# Altium PCB 330 下灯位.PcbDoc (part 3 of 5)
Units mm, origin at the board's own origin, x right, y up, seen from the top; angles counter-clockwise.
Board outline 301.8 x 92.3 mm, 2 copper layers (Top, Bottom), stack 0.323 mm thick; 298 components, 203 nets, 2190 pads, 758 vias.
Unrouted connection lines stored in the file: 36.
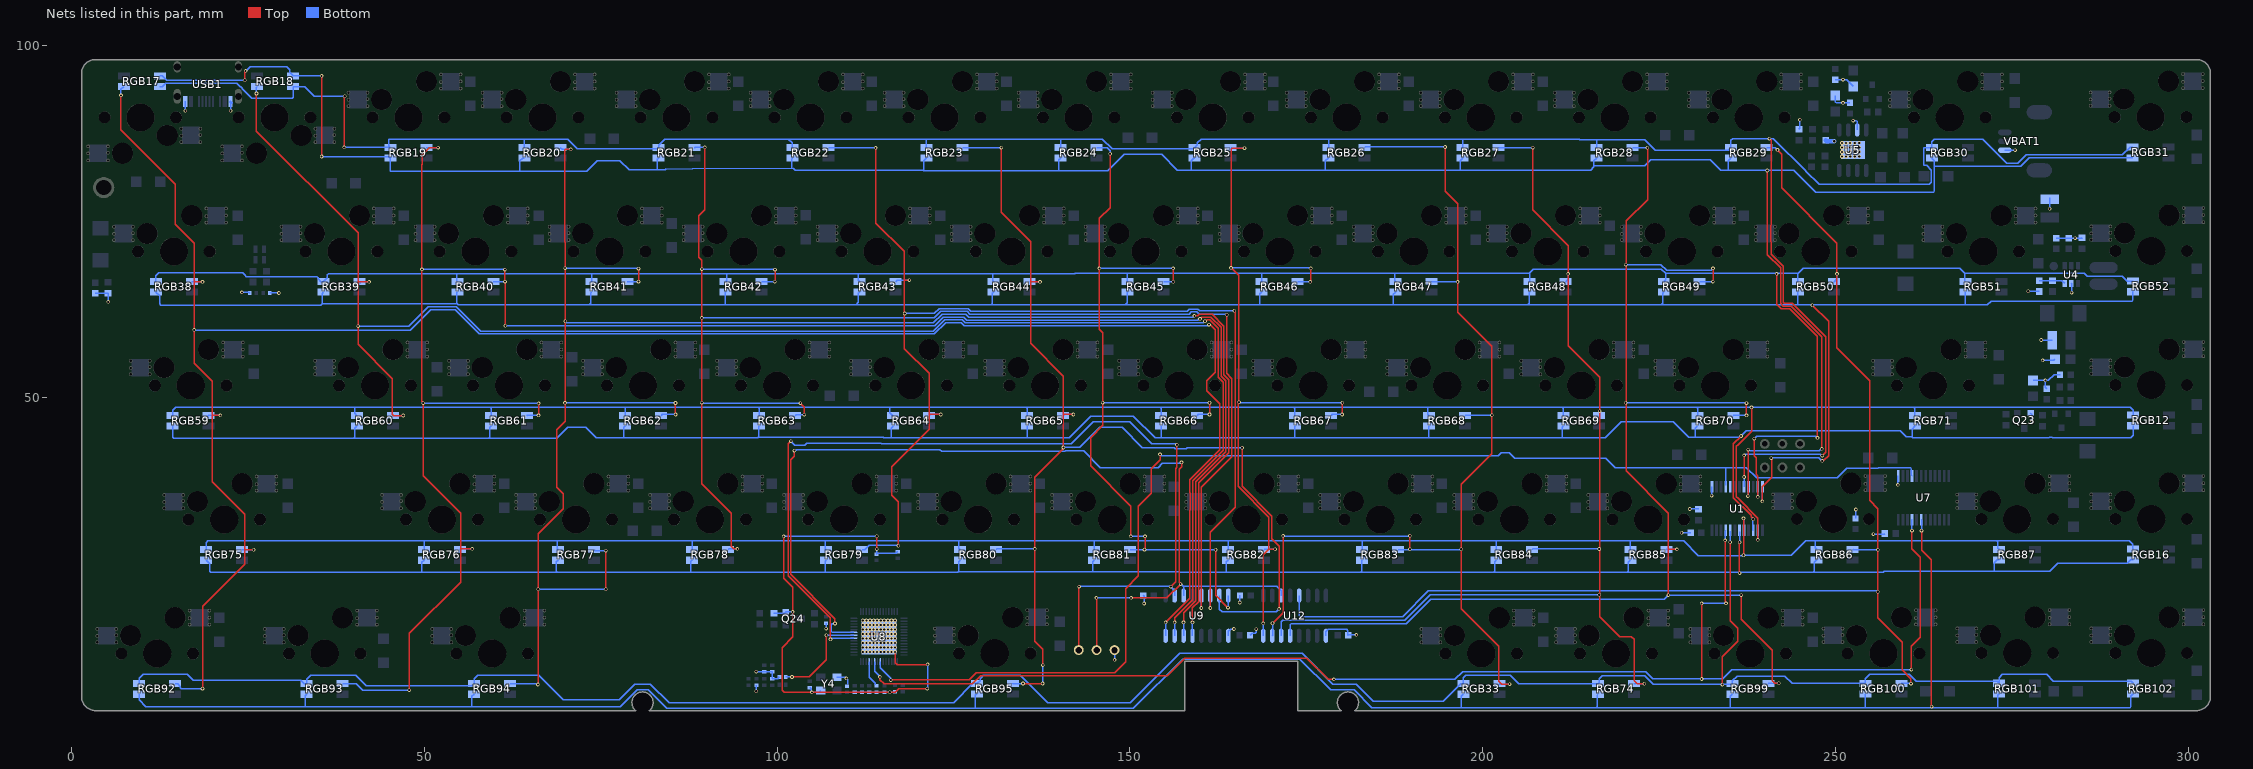
[diagram p3: the nets of this part, all layers, seen from the top]

## Via types
v1: diameter 0.508, hole 0.305, Top to Bottom, tented both sides, 758 vias

## Nets (pads, with @x,y where several pads share a name; then routed paths per layer and width w, separated by ;. In a path a pad name is that pad's centre, name@x,y a point inside that pad or via, vN(x,y) a via of type N, cw(c..) or ccw(c..) an arc to the next point about the centre after c; other vN are vias at no path point) (continued)
DG1: RGB17.1 RGB18.1 RGB19.1 RGB20.1 RGB21.1 RGB22.1 RGB23.1 RGB24.1 RGB25.1 RGB26.1 RGB27.1 RGB28.1 RGB29.1 RGB30.1 RGB31.1 U1.9 | length 387
  Top w0.2: v1(24.519,94.996) 24.519,96.115 24.652,96.248 v1(24.652,96.332) ; v1(35.427,84.195) v1(35.427,95.625) ; v1(237.611,36.048) 237.659,36.096 237.659,42.633 v1(237.664,42.637) ; v1(240.346,82.217) 240.346,70.296 242.235,68.407 242.235,63.36 242.603,62.992 243.737,62.992 248.087,58.642 v1(248.087,42.752)
  Bottom w0.152: 84.287,82.47 84.311,82.494 88.031,82.494 88.034,82.497 102.065,82.497 102.301,82.497
  Bottom w0.2: RGB17.1@12.503,95.614 12.853,95.614 13.471,94.996 v1(24.519,94.996) ; v1(24.652,96.332) 24.704,96.332 25.273,96.901 30.447,96.901 30.879,96.469 30.879,96.119 RGB18.1@31.379,95.619 35.421,95.619 v1(35.427,95.625) v1@35.433,95.631 ; v1(35.427,84.195) 44.908,84.195 45.16,83.942 45.16,82.152 45.212,82.1 63.501,82.1 ; RGB20.1@64.182,83.964 63.901,83.964 63.501,83.564 63.501,82.1 ; RGB21.1@83.182,83.964 83.036,83.819 83.036,82.31 83.056,82.29 ; 84.287,82.47 84.107,82.29 83.056,82.29 ; 102.065,82.497 102.065,83.847 RGB22.1@102.182,83.964 ; 102.301,82.497 102.585,82.213 120.684,82.213 120.749,82.148 ; RGB23.1@121.182,83.964 121.149,83.964 120.749,83.564 120.749,82.148 ; 139.953,82.22 139.953,83.735 RGB24.1@140.182,83.964 ; 158.688,82.267 158.688,83.564 159.088,83.964 RGB25.1@159.182,83.964 ; 177.691,82.273 196.86,82.273 ; RGB26.1@178.182,83.964 178.091,83.964 177.691,83.564 177.691,82.248 158.688,82.248 156.749,82.248 154.504,84.493 149.203,84.493 146.858,82.148 139.953,82.148 120.749,82.148 ; 196.843,82.273 196.843,83.626 RGB27.1@197.182,83.964 ; 196.86,82.271 215.323,82.271 215.768,82.715 215.768,82.856 ; RGB28.1@216.182,83.964 216.168,83.964 215.768,83.564 215.768,82.856 ; 234.835,82.256 233.739,82.256 232.258,83.736 223.804,83.736 222.967,82.899 220.514,82.899 220.472,82.856 215.768,82.856 ; 234.835,82.269 240.293,82.269 v1(240.346,82.217) ; 234.835,82.35 234.835,83.617 RGB29.1@235.182,83.964 ; v1(237.611,36.048) 237.668,36.106 237.668,37.34 U1.9@237.718,37.39 ; v1(237.664,42.637) 237.747,42.637 237.921,42.463 247.728,42.463 248.017,42.752 v1(248.087,42.752) ; v1@240.346,82.269 244.089,82.269 247.223,79.135 263.934,79.135 264.051,79.252 264.051,82.804 ; RGB30.1@263.682,83.964 264.051,83.595 264.051,82.804 ; RGB31.1@292.142,84.014 277.476,84.014 276.266,82.804 264.051,82.804 ; 63.501,82.1 73.008,82.1 74.509,83.601 77.691,83.601 79.002,82.29 83.056,82.29
DG2: RGB38.1 RGB39.1 RGB40.1 RGB41.1 RGB42.1 RGB43.1 RGB44.1 RGB45.1 RGB46.1 RGB47.1 RGB48.1 RGB49.1 RGB50.1 RGB51.1 RGB52.1 U1.12 | length 347.6
  Top w0.2: v1(239.667,35.308) 239.667,37.367 241.001,38.701 241.001,41.353 v1(240.919,41.435) ; v1(246.761,63.119) 249.041,60.839 249.041,41.804 248.397,41.16 248.348,41.16 248.242,41.054 v1(248.159,41.054)
  Bottom w0.2: RGB38.1@11.932,64.964 12.446,64.45 12.446,63.298 12.6,63.144 35.324,63.144 35.477,63.298 35.477,64.76 RGB39.1@35.682,64.964 ; 35.477,63.301 54.67,63.301 54.809,63.162 73.371,63.162 ; 54.61,63.301 54.61,64.892 RGB40.1@54.682,64.964 ; RGB41.1@73.682,64.964 73.597,64.879 73.597,63.387 73.371,63.162 ; RGB42.1@92.682,64.964 92.623,64.905 92.623,63.285 92.5,63.162 ; RGB43.1@111.682,64.964 111.527,64.809 111.527,63.501 111.188,63.162 ; RGB44.1@130.682,64.964 130.521,64.803 130.521,63.301 130.382,63.162 ; RGB45.1@149.682,64.964 149.625,64.907 149.625,63.92 149.625,63.43 149.357,63.162 ; RGB46.1@168.682,64.964 168.441,64.723 168.441,63.279 168.324,63.162 ; RGB47.1@187.682,64.964 187.359,64.641 187.359,63.28 187.241,63.162 ; RGB48.1@206.682,64.964 206.617,64.899 206.617,63.408 206.371,63.162 ; RGB49.1@225.682,64.964 225.553,64.835 225.553,63.368 225.347,63.162 ; v1(239.667,35.308) U1.12@239.667,37.389 ; v1(240.919,41.435) 241.002,41.435 241.08,41.513 247.645,41.513 248.103,41.054 v1(248.159,41.054) ; RGB50.1@244.682,64.964 244.682,63.162 ; RGB51.1@268.432,64.964 268.432,63.279 268.315,63.162 ; RGB52.1@292.236,65.025 292.202,64.99 292.202,63.815 292.085,63.698 272.105,63.698 271.569,63.162 268.315,63.162 ; 73.371,63.162 92.5,63.162 ; 92.5,63.162 111.188,63.162 ; 111.188,63.162 130.382,63.162 ; 130.382,63.162 149.357,63.162 ; 149.357,63.162 168.324,63.162 ; 168.324,63.162 187.241,63.162 ; 187.241,63.162 206.371,63.162 ; 206.371,63.162 225.347,63.162 ; 225.347,63.162 244.682,63.162 ; 244.682,63.162 268.315,63.162
DG3: RGB12.1 RGB59.1 RGB60.1 RGB61.1 RGB62.1 RGB63.1 RGB64.1 RGB65.1 RGB66.1 RGB67.1 RGB68.1 RGB69.1 RGB70.1 RGB71.1 U1.15 | length 323.4
  Top w0.2: v1(236.64,44.571) 235.56,43.491 235.56,35.833 238.066,33.327 238.066,33.163 238.379,32.849 v1(238.379,32.766)
  Bottom w0.2: RGB59.1@14.312,45.964 14.312,44.385 14.429,44.268 39.999,44.268 ; RGB60.1@40.437,45.964 40.116,45.644 40.116,44.385 39.999,44.268 ; RGB61.1@59.437,45.964 59.257,45.785 59.257,44.385 59.14,44.268 ; RGB62.1@78.437,45.964 78.273,45.801 78.273,44.323 ; 97.343,44.405 115.016,44.405 115.117,44.304 116.021,44.304 ; RGB63.1@97.437,45.964 97.379,45.906 97.379,44.44 97.243,44.304 78.292,44.304 78.273,44.323 ; RGB64.1@116.437,45.964 116.138,45.665 116.138,44.422 116.021,44.304 ; RGB65.1@135.437,45.964 135.437,44.422 135.319,44.304 ; RGB66.1@154.437,45.964 154.437,44.292 ; RGB67.1@173.437,45.964 173.383,45.91 173.383,44.336 ; 192.283,44.325 192.337,44.379 192.337,45.864 RGB68.1@192.437,45.964 ; 211.235,44.325 211.316,44.406 211.316,45.843 RGB69.1@211.437,45.964 ; RGB70.1@230.437,45.964 230.123,45.651 230.123,44.412 ; v1@236.625,44.566 237.398,45.339 259.177,45.339 260.076,44.44 260.888,44.44 ; v1(236.64,44.571) 236.63,44.561 236.537,44.561 236.388,44.412 230.123,44.412 ; U1.15@238.366,31.18 238.32,31.226 238.32,32.707 v1(238.379,32.766) ; RGB71.1@261.312,45.964 261.288,45.964 260.888,45.564 260.888,44.36 280.306,44.36 280.309,44.363 280.768,44.363 280.772,44.36 291.886,44.36 292.236,44.71 RGB12.1@292.236,46.025 ; 39.999,44.268 59.14,44.268 ; 59.14,44.268 68.779,44.268 70.312,45.801 72.704,45.801 72.707,45.798 72.86,45.798 74.335,44.323 78.273,44.323 ; 116.021,44.304 135.319,44.304 ; 135.319,44.304 141.373,44.304 144.454,47.386 150.5,47.386 153.593,44.292 154.437,44.292 ; 154.437,44.292 166.951,44.292 166.984,44.325 173.372,44.325 173.383,44.336 ; 173.383,44.336 173.393,44.325 192.337,44.325 211.316,44.325 217.376,44.325 219.652,46.601 227.051,46.601 229.241,44.412 230.123,44.412
DG4: RGB16.1 RGB75.1 RGB76.1 RGB77.1 RGB78.1 RGB79.1 RGB80.1 RGB81.1 RGB82.1 RGB83.1 RGB84.1 RGB85.1 RGB86.1 RGB87.1 U1.18 | length 303.2
  Top w0.2: v1(236.438,25.146) 236.407,25.177 236.407,29.482 v1@236.438,29.513 ; v1(236.443,29.513) v1@236.472,29.543
  Bottom w0.2: RGB75.1@19.062,26.964 19.558,26.468 19.558,25.411 19.675,25.293 49.534,25.293 ; RGB76.1@49.937,26.964 49.651,26.679 49.651,25.411 49.534,25.293 ; RGB77.1@68.937,26.964 68.703,26.73 68.703,25.411 68.82,25.293 ; RGB78.1@87.937,26.964 87.76,26.788 87.76,25.637 87.76,25.293 ; RGB79.1@106.937,26.964 106.82,26.847 106.82,25.293 ; RGB80.1@125.937,26.964 125.75,26.777 125.75,25.411 125.639,25.299 ; RGB81.1@144.937,26.964 144.74,26.768 144.74,25.299 ; RGB82.1@163.937,26.964 163.687,26.714 163.687,25.393 163.57,25.277 ; RGB83.1@182.937,26.964 182.88,26.907 182.88,25.416 182.741,25.277 ; RGB84.1@201.937,26.964 201.713,26.741 201.713,25.386 201.596,25.269 ; RGB85.1@220.937,26.964 220.65,26.677 220.65,25.386 220.533,25.269 ; v1(236.443,29.513) U1.18@236.443,31.018 ; RGB86.1@247.352,27.014 246.987,26.649 246.987,25.385 246.869,25.268 ; RGB87.1@273.225,27.009 272.969,27.009 272.569,26.609 272.569,25.41 ; RGB16.1@292.236,27.025 291.886,27.025 291.397,26.536 281.507,26.536 280.381,25.41 272.569,25.41 ; 49.534,25.293 68.82,25.293 ; 68.82,25.293 87.76,25.293 ; 87.76,25.293 106.82,25.293 ; 106.82,25.293 106.822,25.291 125.63,25.291 125.639,25.299 ; 125.639,25.299 144.74,25.299 ; 144.74,25.299 150.443,25.299 150.486,25.343 156.995,25.343 157.061,25.276 163.57,25.276 ; 163.57,25.277 182.741,25.277 ; 182.741,25.277 182.733,25.269 201.596,25.269 ; 201.596,25.269 220.533,25.269 ; 220.533,25.269 230.99,25.269 230.991,25.268 236.438,25.268 246.869,25.268 ; 246.869,25.268 256.763,25.268 256.905,25.41 272.569,25.41
DG5: RGB33.1 RGB74.1 RGB92.1 RGB93.1 RGB94.1 RGB95.1 RGB99.1 RGB100.1 RGB101.1 RGB102.1 U7.19 | length 336.5
  Top w0.2: v1(262.224,31.164) 262.224,28.398 263.58,27.042 263.58,6.284 v1(263.656,6.208)
  Bottom w0.2: RGB92.1@9.562,7.964 9.562,7.158 10.519,6.201 33.115,6.201 ; RGB93.1@33.307,7.964 33.115,7.773 33.115,6.201 ; RGB94.1@57.052,7.964 56.735,7.647 56.735,6.318 56.618,6.201 ; RGB95.1@128.307,8.006 128.09,7.789 128.09,5.996 128.063,5.969 ; RGB33.1@197.27,7.964 196.989,7.683 196.989,6.187 196.871,6.07 ; RGB74.1@216.357,7.964 216.25,7.857 216.25,6.187 216.133,6.07 ; 235.143,6.069 254.273,6.069 ; RGB99.1@235.407,7.964 235.142,7.699 235.142,6.07 216.133,6.07 ; RGB100.1@254.273,7.998 254.273,6.069 ; U7.19@262.184,32.714 262.227,32.671 262.224,32.669 v1(262.224,31.164) ; 273.049,6.069 263.656,6.069 254.273,6.069 ; RGB101.1@273.225,8.025 273.05,7.85 273.05,6.07 291.796,6.07 291.913,6.187 291.913,7.702 RGB102.1@292.236,8.025 ; 33.115,6.201 56.618,6.201 ; 56.618,6.201 77.743,6.201 80.143,8.601 81.707,8.601 84.339,5.969 128.063,5.969 ; 128.063,5.969 150.481,5.969 157.468,12.956 174.09,12.956 178.445,8.601 181.777,8.601 184.308,6.07 196.871,6.07 ; 196.871,6.07 216.133,6.07
DIN: DIN.1 U8.35 U9.2 | length 135.9
  Top w0.2: v1(101.942,43.851) 101.537,43.446 101.537,24.782 107.541,18.778 107.541,15.773 v1(107.562,15.752) ; DIN.1@142.748,14.224 142.775,14.251 142.775,23.205 v1(142.801,23.231) ; v1(155.785,23.226) 156.493,23.935 156.493,39.965 156.673,40.145 v1(156.673,43.338)
  Bottom w0.2: v1(101.942,43.851) 102.496,43.297 103.932,43.297 104.168,43.533 114.756,43.533 114.785,43.504 141.704,43.504 144.786,46.586 149.989,46.586 153.098,43.478 156.425,43.478 156.564,43.338 v1(156.673,43.338) ; v1(107.562,15.752) 107.74,15.929 U8.35@110.877,15.929 ; v1(142.801,23.231) 142.826,23.256 155.755,23.256 v1(155.785,23.226) 155.785,23.209 156.337,22.656 U9.2@156.337,21.956
DR0: U1.5
DR1: RGB17.2 RGB18.2 RGB19.2 RGB20.2 RGB21.2 RGB22.2 RGB23.2 RGB24.2 RGB25.2 RGB26.2 RGB27.2 RGB28.2 RGB29.2 RGB30.2 RGB31.2 U1.8 | length 382.4
  Top w0.2: v1(38.63,85.484) 38.63,92.669 v1(38.707,92.746) ; v1(237.064,38.758) 237.066,38.76 237.066,41.827 v1(237.064,41.829) ; v1(240.665,86.741) 240.665,86.704 240.9,86.47 240.9,74.48 240.882,74.462 240.882,72.107 240.9,72.089 240.9,70.36 241.777,69.482 241.795,69.482 242.652,68.625 242.652,63.509 242.769,63.392 243.903,63.392 248.641,58.654 248.641,42.266 248.172,41.797 v1(248.144,41.797)
  Bottom w0.2: RGB17.2@12.503,94.114 12.853,94.114 13.335,94.596 23.387,94.596 23.908,94.075 23.942,94.075 24.411,93.606 24.411,93.572 25.527,92.456 31.262,92.456 31.379,92.573 RGB18.2@31.379,94.119 33.008,94.119 34.381,92.746 v1(38.707,92.746) ; v1(38.63,85.484) RGB19.2@45.163,85.484 ; RGB19.2@45.182,85.464 44.925,85.722 44.925,86.673 70.299,86.673 71.687,85.285 82.971,85.285 RGB21.2@83.15,85.464 ; RGB20.2@64.182,85.464 64.182,86.535 ; RGB21.2@83.182,85.464 83.182,85.815 84.04,86.673 101.59,86.673 ; RGB22.2@102.182,85.464 102.116,85.53 102.116,86.147 101.59,86.673 ; 121.155,86.58 121.155,85.491 RGB23.2@121.182,85.464 ; RGB24.2@140.182,85.464 140.182,86.647 140.208,86.673 ; RGB26.2@178.182,85.464 178.182,86.547 178.056,86.673 ; RGB27.2@197.182,85.464 197.182,86.673 ; 216.154,86.56 216.154,85.492 RGB28.2@216.182,85.464 ; v1(237.064,38.758) 237.066,38.756 237.066,37.392 U1.8@237.068,37.39 ; v1(237.064,41.829) 237.148,41.829 237.295,41.976 237.323,41.976 237.336,41.989 247.868,41.989 248.061,41.797 v1(248.144,41.797) ; RGB31.2@292.142,85.514 291.792,85.514 290.692,84.414 277.073,84.414 275.891,83.232 274.286,83.232 270.904,86.614 264.033,86.614 263.682,86.263 RGB30.2@263.682,85.464 262.626,85.464 262.509,85.347 262.509,83.048 262.626,82.931 262.968,82.931 263.629,82.27 263.629,80.521 263.338,80.23 247.737,80.23 245.828,82.139 245.828,82.144 241.231,86.741 v1(240.665,86.741) 235.458,86.741 235.182,86.465 RGB29.2@235.182,85.464 234.797,85.079 224.506,85.079 222.985,86.6 216.154,86.6 213.792,86.6 213.719,86.673 197.182,86.673 ; 101.59,86.673 121.155,86.673 140.208,86.673 ; 140.208,86.673 146.117,86.673 147.497,85.293 159.011,85.293 RGB25.2@159.182,85.464 159.184,85.464 159.584,85.864 159.584,86.147 160.11,86.673 178.056,86.673 ; 178.056,86.673 197.182,86.673
DR2: RGB38.2 RGB39.2 RGB40.2 RGB41.2 RGB42.2 RGB43.2 RGB44.2 RGB45.2 RGB46.2 RGB47.2 RGB48.2 RGB49.2 RGB50.2 RGB51.2 RGB52.2 U1.11 | length 344.2
  Top w0.2: v1(238.507,44.197) 238.507,41.759 238.767,41.5 238.767,39.145 239.014,38.898 v1(239.014,35.941) ; v1(241.681,67.564) 241.681,63.246 242.335,62.592 243.571,62.592 247.477,58.686 v1(247.477,44.309)
  Bottom w0.2: RGB38.2@11.932,66.464 11.932,67.304 12.319,67.691 24.257,67.691 24.491,67.457 24.774,67.174 25.174,67.174 34.736,67.174 34.932,66.978 34.932,66.864 35.332,66.464 RGB39.2@35.682,66.464 36.222,67.005 36.222,67.422 36.406,67.605 54.465,67.605 ; RGB40.2@54.682,66.464 54.582,66.564 54.582,67.488 54.465,67.605 ; RGB41.2@73.682,66.464 73.682,67.574 73.651,67.605 ; RGB42.2@92.682,66.464 92.837,66.619 92.837,67.605 ; RGB43.2@111.682,66.464 111.506,66.64 111.506,67.605 ; RGB44.2@130.682,66.464 130.556,66.59 130.556,67.605 ; RGB45.2@149.682,66.464 149.606,66.54 149.606,67.645 ; RGB46.2@168.682,66.464 168.682,67.619 168.656,67.645 ; RGB47.2@187.682,66.464 187.567,66.58 187.567,67.645 ; RGB48.2@206.682,66.464 206.682,67.592 206.629,67.645 ; RGB49.2@225.682,66.464 225.933,66.715 225.933,67.645 ; v1(238.507,44.197) 238.848,44.538 247.206,44.538 247.436,44.309 v1(247.477,44.309) ; v1(239.014,35.941) 239.018,35.945 U1.11@239.018,37.39 ; RGB50.2@244.682,66.464 244.682,67.598 244.729,67.645 ; RGB51.2@268.432,66.464 268.338,66.558 268.338,67.645 ; RGB52.2@292.236,66.525 291.386,66.525 290.708,67.203 285.73,67.203 285.288,67.645 268.338,67.645 ; 54.465,67.605 73.651,67.605 ; 73.651,67.605 92.837,67.605 ; 92.837,67.605 111.506,67.605 ; 111.506,67.605 130.556,67.605 ; 130.556,67.605 142.213,67.605 142.252,67.645 149.606,67.645 ; 149.606,67.645 168.656,67.645 ; 168.656,67.645 187.567,67.645 ; 187.567,67.645 206.629,67.645 ; 206.629,67.645 207.202,68.218 225.36,68.218 225.933,67.645 ; 225.933,67.645 244.729,67.645 ; 244.729,67.645 245.429,68.345 267.638,68.345 268.338,67.645
DR3: RGB12.2 RGB59.2 RGB60.2 RGB61.2 RGB62.2 RGB63.2 RGB64.2 RGB65.2 RGB66.2 RGB67.2 RGB68.2 RGB69.2 RGB70.2 RGB71.2 U1.14 | length 317.3
  Top w0.2: v1(238.125,48.622) 238.125,45.273 236.211,43.358 235.96,43.107 235.96,35.998 236.211,35.747 239.018,32.94 v1(239.018,29.849)
  Bottom w0.2: RGB59.2@14.312,47.464 14.312,48.221 14.747,48.656 40.113,48.656 ; RGB60.2@40.437,47.464 40.113,47.789 40.113,48.656 ; 59.334,48.642 78.423,48.642 78.437,48.656 ; RGB61.2@59.437,47.464 59.437,48.539 59.32,48.656 40.113,48.656 ; RGB62.2@78.437,47.464 78.437,48.656 ; RGB63.2@97.437,47.464 97.437,48.539 97.32,48.656 ; RGB64.2@116.437,47.464 116.367,47.464 115.967,47.864 115.967,48.656 ; RGB65.2@135.437,47.464 135.437,48.539 135.32,48.656 ; RGB66.2@154.437,47.464 154.437,48.539 154.32,48.656 ; RGB67.2@173.437,47.464 173.355,47.546 173.355,48.514 173.213,48.656 ; RGB68.2@192.437,47.464 192.251,47.65 192.251,48.539 192.141,48.649 ; RGB69.2@211.437,47.464 211.437,48.539 211.327,48.649 ; RGB70.2@230.437,47.464 230.505,47.532 230.505,48.539 230.388,48.656 ; v1(238.125,48.622) 238.091,48.656 230.388,48.656 ; v1@238.125,48.656 261.099,48.656 ; v1(239.018,29.849) U1.14@239.018,31.19 ; RGB71.2@261.312,47.464 261.276,47.5 261.276,48.479 261.099,48.656 ; RGB12.2@292.236,47.525 292.236,48.251 291.846,48.641 267.142,48.641 267.127,48.656 261.099,48.656 ; 78.437,48.656 97.32,48.656 ; 97.32,48.656 115.967,48.656 ; 115.967,48.656 135.32,48.656 ; 135.32,48.656 154.32,48.656 ; 154.32,48.656 173.213,48.656 ; 173.213,48.656 181.259,48.656 181.266,48.649 192.141,48.649 ; 192.141,48.649 211.327,48.649 ; 211.327,48.649 220.854,48.649 220.861,48.656 230.388,48.656
DR4: RGB16.2 RGB75.2 RGB76.2 RGB77.2 RGB78.2 RGB79.2 RGB80.2 RGB81.2 RGB82.2 RGB83.2 RGB84.2 RGB85.2 RGB86.2 RGB87.2 U1.17 | length 298.9
  Top w0.2: v1(236.986,27.661) 236.997,27.672 236.997,32.878 v1(236.982,32.893) v1@237.038,32.949
  Bottom w0.2: RGB75.2@19.062,28.464 19.062,29.474 19.292,29.704 49.937,29.704 ; RGB76.2@49.937,28.464 49.937,29.704 ; RGB77.2@68.937,28.464 68.834,28.567 68.834,29.704 ; RGB78.2@87.937,28.464 87.937,29.651 87.884,29.704 ; RGB79.2@106.937,28.464 106.807,28.594 106.807,29.704 ; RGB80.2@125.937,28.464 125.73,28.671 125.73,29.704 ; RGB81.2@144.937,28.464 144.937,29.674 144.907,29.704 ; RGB82.2@163.937,28.464 163.937,29.653 163.886,29.704 ; RGB83.2@182.937,28.464 182.937,29.633 182.866,29.704 ; RGB84.2@201.937,28.464 201.93,28.471 201.93,29.704 ; RGB85.2@220.937,28.464 220.937,29.661 220.98,29.704 ; v1(236.982,32.893) 237.057,32.818 237.03,32.79 U1.17@237.03,31.486 ; RGB86.2@247.352,28.514 247.142,28.724 247.142,29.704 ; RGB87.2@273.225,28.509 273.038,28.695 273.038,29.579 272.914,29.704 ; RGB16.2@292.236,28.525 292.164,28.597 292.164,29.208 291.668,29.704 272.914,29.704 ; 49.937,29.704 68.834,29.704 ; 68.834,29.704 87.884,29.704 ; 87.884,29.704 106.807,29.704 ; 106.807,29.704 125.73,29.704 ; 125.73,29.704 144.907,29.704 ; 144.907,29.704 163.886,29.704 ; 163.886,29.704 182.866,29.704 ; 182.866,29.704 182.937,29.704 201.93,29.704 ; 201.93,29.704 220.98,29.704 ; 220.98,29.704 228.503,29.704 230.584,27.623 236.986,27.623 237.023,27.661 243.76,27.661 245.803,29.704 247.142,29.704 ; 247.142,29.704 272.914,29.704
DR5: RGB33.2 RGB74.2 RGB92.2 RGB93.2 RGB94.2 RGB95.2 RGB99.2 RGB100.2 RGB101.2 RGB102.2 U1.20 | length 330.2
  Top w0.2: v1(233.991,9.339) 233.991,13.265 236.198,15.472 236.198,17.294 235.109,18.383 235.109,29.497 v1(235.09,29.516)
  Bottom w0.2: RGB92.2@9.562,9.464 9.562,10.231 10.126,10.795 16.394,10.795 17.261,9.929 32.493,9.929 32.957,9.464 RGB93.2@33.307,9.464 33.307,10.066 33.909,10.668 40.259,10.668 41.783,9.144 56.732,9.144 RGB94.2@57.052,9.464 57.052,10.189 57.531,10.668 66.189,10.668 69.653,7.204 77.615,7.204 79.812,9.401 82.039,9.401 84.67,6.769 125.006,6.769 127.743,9.506 128.366,9.506 128.766,9.906 128.766,10.189 128.908,10.331 129.228,10.651 134.465,10.651 138.329,6.787 150.067,6.787 157.036,13.756 174.427,13.756 178.782,9.401 182.108,9.401 184.524,6.985 194.44,6.985 196.92,9.464 RGB33.2@197.27,9.464 197.27,10.326 197.611,10.667 203.893,10.667 205.096,9.464 RGB74.2@216.357,9.464 216.522,9.629 216.522,10.147 216.944,10.569 223.01,10.569 224.181,9.398 233.991,9.398 235.341,9.398 RGB99.2@235.407,9.464 235.407,9.855 236.093,10.541 242.824,10.541 243.867,9.498 RGB100.2@254.273,9.498 254.273,10.179 254.889,10.795 260.477,10.795 261.493,9.779 272.971,9.779 RGB101.2@273.225,9.525 273.225,10.335 273.685,10.795 279.968,10.795 280.929,9.834 291.927,9.834 RGB102.2@292.236,9.525 ; v1(235.09,29.516) U1.20@235.09,31.05
DVDD12-BT: C36.2 U8.36 | length 14.1
  Top w0.2: v1(102.108,10.414) 104.521,10.414 106.946,12.839 106.946,16.197 106.987,16.238 v1(106.987,16.327)
  Bottom w0.2: C36.2@101.23,10.414 v1(102.108,10.414) ; v1(106.987,16.327) 106.988,16.329 U8.36@110.877,16.329
DVDD12_SEC: C33.2 U8.25 | length 3.7
  Bottom w0.2: U8.25@113.027,12.579 113.027,10.385 113.881,9.531 C33.2@113.881,9.305 ; C33.2@113.881,9.305 C33.2@113.933,9.305
EC: 
FB: R40.2 R77.1 U4.3 | length 3.8
  Bottom w0.2: R77.1@278.916,66.603 282.118,66.603 U4.3@282.514,66.207
GCLK: U1.21 U7.21 U8.23 | length 200.4
  Top w0.2: v1(114.565,10.425) 114.565,10.004 115.147,9.422 127.659,9.422 128.853,10.616 155.324,10.616 157.48,12.772 157.789,13.081 175.103,13.081 178.111,10.072 v1(178.928,10.072) ; v1(231.046,10.125) v1(231.046,20.836) ; v1(234.379,29.768) 234.4,29.747 234.4,21.063 234.508,20.955 v1(234.508,20.836) ; v1(260.79,11.468) 260.753,11.505 260.753,14.754 262.012,16.013 262.012,27.421 260.858,28.575 260.858,31.153 v1(260.871,31.167)
  Bottom w0.2: U8.23@113.827,12.579 113.827,11.231 114.565,10.493 v1(114.565,10.425) ; v1(178.928,10.072) 196.06,10.072 197.164,11.176 223.139,11.176 224.155,10.16 234.031,10.16 235.305,11.434 260.756,11.434 v1(260.79,11.468) ; v1(231.046,20.836) v1(234.508,20.836) ; v1(234.379,29.768) 234.379,31.101 U1.21@234.468,31.19 ; v1(260.871,31.167) 260.871,32.701 U7.21@260.884,32.714
GND: C1.1 C2.1 C3.2 C4.1 C5.1 C6.2 C7.1 C11.1 C13.1 C14.2 C15.2 C16.1 C17.2 C19.1 C20.1 C21.1 C23.1 C25.1 C27.1 C28.1 C32.2 C33.1 C34.1 C35.1 C36.1 C37.1 C38.1 C40.1 C41.2 C43.1 C44.2 CA2.2 CA3.2 GND.1 Q23.2 Q24.2 R3.1 R5.1 R10.2 R11.2 R56.1 R70.2 R77.2 R80.2 R91.2 U1.1 U4.2 U5.3 U5.9 U7.1 U8.57 U9.9 U12.9 USB1.A1 USB1.B1 VBAT1.3 Y4.2 Y4.4 Z1.1 Z2.1 Z3.1 | length 150.5
  Top w0.2: v1(100.908,30.335) 100.908,24.441 102.235,23.114 102.235,16.082 100.711,14.558 100.711,8.509 100.999,8.221 v1(104.931,8.221) 104.949,8.238 115.934,8.238 v1(115.951,8.255) 116.713,8.255 117.221,8.763 v1(121.285,8.763) ; v1(114.117,28.544) v1(114.117,30.372) ; v1(116.713,13.97) 116.713,12.446 117.017,12.142 121.278,12.142 v1(121.332,12.196)
  Bottom w0.2: C21.1@3.321,64.805 R5.1@5.169,64.806 R5.1@5.169,64.806 v1(5.169,63.589) ; v1(16.121,90.676) USB1.A1@16.121,92.007 ; v1(22.521,90.676) 22.521,91.934 USB1.B1@22.521,92.007 ; v1(24.118,64.933) 25.094,64.933 25.213,64.815 Z2.1@25.25,64.852 ; Z1.1@28.038,64.852 v1(29.369,64.852) ; v1(97.028,8.382) 97.028,9.222 C27.1@97.061,9.255 ; v1(97.028,11.176) 97.043,11.161 Z3.1@98.171,11.161 C13.1@99.304,11.161 C13.1@99.304,11.161 C20.1@99.303,10.173 100.089,10.173 C36.1@100.33,10.414 ; R56.1@99.531,19.439 101.062,19.439 Q24.2@101.244,19.622 101.265,19.642 v1(102.185,19.642) ; v1(100.908,30.335) 114.08,30.335 v1(114.117,30.372) ; C7.1@104.614,8.879 104.664,8.879 104.814,8.729 104.814,8.338 v1(104.931,8.221) 105.914,8.221 Y4.2@106.175,8.482 ; v1(106.934,17.272) C38.1@106.934,18.034 ; Y4.4@108.475,10.382 109.633,10.382 v1(109.808,10.207) 109.982,10.033 109.982,9.398 ; C34.1@110.99,8.255 C43.1@112.019,8.255 116.655,8.255 R3.1@116.713,8.313 ; C37.1@114.081,27.839 114.203,27.961 116.869,27.961 117.044,28.136 C19.1@117.094,28.136 ; v1(114.117,28.544) 114.117,27.971 C37.1@114.127,27.961 ; v1(121.285,8.763) 121.332,8.81 v1(121.332,12.196) ; v1(147.828,12.827) GND.1@147.828,14.224 ; C14.2@151.904,21.971 152.019,21.856 v1(152.019,20.828) ; U9.9@163.957,16.256 163.957,16.878 164.292,17.213 v1(164.738,17.213) ; v1(165.578,20.968) C16.1@165.578,21.996 ; C17.2@167.03,16.32 167.347,16.637 167.791,16.637 167.908,16.754 v1(167.908,17.205) ; U12.9@177.8,16.256 177.8,16.821 178.124,17.145 180.71,17.145 180.902,16.953 180.902,16.381 C11.1@180.963,16.32 181.026,16.383 v1(182.118,16.383) ; v1(228.219,30.861) C35.1@229.489,30.861 ; v1(229.358,34.231) R10.2@230.628,34.231 ; v1(232.458,36.116) U1.1@232.458,37.386 ; R11.2@244.827,88.047 244.983,88.202 v1(244.983,89.408) ; C44.2@249.986,95.09 251.605,95.09 C3.2@252.549,94.146 ; C41.2@249.989,92.829 249.989,91.911 250.106,91.794 v1(251.094,91.794) C6.2@252.081,91.794 ; v1(252.532,89.279) 252.973,89.279 253.09,89.162 253.09,87.981 U5.3@253.111,87.96 ; C5.1@252.917,32.885 v1(252.917,34.155) ; v1(255.393,30.667) 255.395,30.665 256.971,30.665 R70.2@257.04,30.734 ; v1(258.874,37.64) U7.1@258.874,38.91 ; VBAT1.3@274.033,85.101 274.037,85.096 v1(275.486,85.096) ; v1(277.348,65.104) R77.2@278.936,65.104 ; Q23.2@277.662,47.832 277.863,47.631 v1(277.863,46.641) ; C32.2@278.048,52.458 v1(279.774,52.458) ; v1(279.195,58.182) CA3.2@280.783,58.182 ; v1(279.391,55.301) 280.978,55.301 C15.2@281.124,55.447 ; C4.1@279.98,51.289 279.774,51.494 v1(279.774,52.458) ; v1(280.375,76.792) CA2.2@280.375,78.379 ; C23.1@281.305,72.632 C28.1@283.083,72.632 284.968,72.632 R80.2@284.988,72.652 ; C25.1@281.857,53.278 281.032,53.278 280.212,52.458 v1(279.774,52.458) ; U4.2@283.423,66.227 283.5,66.15 v1(283.5,64.911)
  Bottom w0.4: USB1.B1@22.515,91.94 22.521,91.934 USB1.B1@22.642,91.813
  Bottom w0.6: R91.2@248.643,86.507 248.789,86.36 v1(249.847,86.36)
  other v1: 112.141,13.97 112.649,13.97 113.157,13.97 113.665,13.97 114.173,13.97 114.681,13.97 115.189,13.97 115.697,13.97 116.205,13.97 112.141,14.605 112.649,14.605 113.157,14.605 113.665,14.605 114.173,14.605 114.681,14.605 115.189,14.605 115.697,14.605 116.205,14.605 116.713,14.605 112.141,15.24 112.649,15.24 113.157,15.24 113.665,15.24 114.173,15.24 114.681,15.24 115.189,15.24 115.697,15.24 116.205,15.24 116.713,15.24 112.141,15.875 112.649,15.875 113.157,15.875 113.665,15.875 114.173,15.875 114.681,15.875 115.189,15.875 115.697,15.875 116.205,15.875 116.713,15.875 112.141,16.51 112.649,16.51 113.157,16.51 113.665,16.51 114.173,16.51 114.681,16.51 115.189,16.51 115.697,16.51 116.205,16.51 116.713,16.51 112.141,17.145 112.649,17.145 113.157,17.145 113.665,17.145 114.173,17.145 114.681,17.145 115.189,17.145 115.697,17.145 116.205,17.145 116.713,17.145 112.141,17.78 112.649,17.78 113.157,17.78 113.665,17.78 114.173,17.78 114.681,17.78 115.189,17.78 115.697,17.78 116.205,17.78 116.713,17.78 112.141,18.415 112.649,18.415 113.157,18.415 113.665,18.415 114.173,18.415 114.681,18.415 115.189,18.415 115.697,18.415 116.205,18.415 116.713,18.415 283.997,72.637 250.952,84.201 251.531,84.184 252.752,84.199 252.12,84.211 253.4,84.215 250.952,84.836 251.531,84.819 252.752,84.834 252.12,84.846 253.4,84.85 250.952,85.471 251.531,85.454 252.752,85.469 252.12,85.481 253.4,85.485 250.952,86.106 251.531,86.089 252.099,86.11 252.752,86.104 253.4,86.12 251.093,95.103
LCK: LCK.1 U8.37 U9.3 U12.3 | length 142.7
  Top w0.2: v1(102.445,42.508) 102.443,42.505 102.443,41.704 101.937,41.198 101.937,24.948 108.196,18.688 v1(108.196,17.999) ; v1(145.255,21.623) 145.271,21.607 145.271,14.241 LCK.1@145.288,14.224 ; v1(150.169,21.623) 155.227,21.623 v1(157.184,23.58) 157.184,23.664 156.972,23.876 156.972,39.878 157.319,40.225 v1(157.319,40.83)
  Bottom w0.2: v1(102.445,42.508) 102.504,42.566 102.716,42.566 102.768,42.618 123.081,42.618 123.302,42.396 140.806,42.396 140.873,42.464 143.442,42.464 145.818,40.088 154.007,40.088 154.616,40.697 157.187,40.697 v1(157.319,40.83) ; v1@108.16,18.017 108.11,17.967 107.792,17.967 107.674,17.85 107.674,16.846 107.792,16.729 U8.37@110.877,16.729 ; v1(145.255,21.623) v1(150.169,21.623) ; v1(157.184,23.58) 157.268,23.58 157.591,23.257 ; U9.3@157.607,21.956 157.607,23.241 157.591,23.257 ; U12.3@171.45,21.956 171.45,22.638 170.831,23.257 157.591,23.257
LE: U1.4 U7.4 U8.21 | length 181.5
  Top w0.2: v1(116.106,9.976) 116.163,10.033 127.254,10.033 128.237,11.016 147.866,11.016 149.4,12.55 149.4,22.937 151.211,24.748 151.211,34.614 153.037,36.441 153.037,39.228 153.021,39.244 153.021,39.925 154.305,41.209 154.305,41.931 v1(154.272,41.963)
  Bottom w0.2: U8.21@114.627,12.579 114.627,11.712 116.106,10.232 v1(116.106,9.976) ; v1(154.272,41.963) 154.432,41.803 202.233,41.803 202.613,42.183 203.808,42.183 204.581,41.41 217.465,41.41 218.782,40.093 234.462,40.093 ; U1.4@234.462,37.574 234.462,40.093 ; U7.4@260.884,38.914 260.784,39.014 260.784,39.952 260.697,40.039 256.09,40.039 256.056,40.005 251.64,40.005 250.26,38.625 238.836,38.625 237.368,40.093 234.462,40.093
LED0: RGB17.4 RGB38.4 RGB59.4 RGB75.4 RGB92.4 U9.16 | length 304.7
  Top w0.2: v1(6.98,92.862) 6.98,87.981 14.692,80.269 14.692,74.589 17.399,71.882 17.399,66.548 ; v1(18.542,8.763) 18.542,20.447 24.511,26.416 24.511,28.575 ; v1(18.542,66.421) 17.526,66.421 17.399,66.548 ; v1(21.082,47.498) 19.939,47.498 ; v1(25.781,28.448) 25.766,28.433 24.653,28.433 24.511,28.575 ; v1(155.066,18.161) 158.486,21.58 158.486,34.055 158.537,34.107 158.537,36.462 158.486,36.514 158.486,38.359 162.743,42.616 162.743,49.143 160.917,50.969 160.917,52.372 162.132,53.587 162.132,55.601 162.137,55.607 162.137,58.062 162.132,58.067 162.132,59.602 161.372,60.362 v1(161.211,60.362) ; 17.399,66.548 17.399,54.864 19.939,52.324 19.939,47.498 ; 19.939,47.498 19.939,38.089 24.511,33.517 24.511,28.575
  Bottom w0.2: v1(6.98,92.862) 6.98,93.714 7.38,94.114 RGB17.4@7.403,94.114 ; RGB92.4@14.662,9.464 15.012,9.464 15.412,9.064 15.412,8.881 15.529,8.764 15.636,8.764 15.638,8.763 v1(18.542,8.763) ; RGB38.4@17.032,66.464 17.075,66.421 v1(18.542,66.421) ; v1(17.36,59.608) 17.383,59.585 47.97,59.585 50.886,62.501 54.339,62.501 57.785,59.055 122.301,59.055 123.89,60.644 126.086,60.644 126.513,60.217 161.036,60.217 161.181,60.362 v1(161.211,60.362) ; RGB59.4@19.412,47.464 19.316,47.464 19.35,47.498 v1(21.082,47.498) ; RGB75.4@24.162,28.464 24.178,28.448 v1(25.781,28.448) ; U9.16@155.067,16.256 v1(155.066,18.161)
LED1: RGB18.4 RGB39.4 RGB60.4 U9.15 | length 233.7
  Top w0.2: v1@26.155,93.175 26.155,87.791 40.593,73.353 40.593,66.421 ; v1(42.164,66.421) 40.593,66.421 ; v1(47,47.477) 46.977,47.454 45.637,47.454 45.466,47.625 45.466,52.705 40.593,57.578 40.593,60.148 40.593,66.421 ; v1(156.337,18.161) 156.337,18.796 158.937,21.396 158.937,38.245 163.217,42.525 163.217,52.211 162.532,52.896 162.532,55.436 162.537,55.441 162.537,58.228 162.532,58.233 162.532,59.833 161.325,61.04 160.945,61.04 160.738,60.833 v1(160.655,60.833)
  Bottom w0.2: v1(26.191,93.126) 26.191,94.031 RGB18.4@26.279,94.119 ; v1(40.598,60.148) 47.793,60.148 50.546,62.901 54.505,62.901 57.951,59.455 122.135,59.455 123.724,61.044 126.251,61.044 126.679,60.617 160.384,60.617 160.6,60.833 v1(160.655,60.833) ; RGB39.4@40.782,66.464 40.782,66.164 41.039,66.421 v1(42.164,66.421) ; RGB60.4@45.537,47.464 45.549,47.477 v1(47,47.477) ; U9.15@156.337,16.256 v1(156.337,18.161)
LED2: RGB19.4 RGB40.4 RGB61.4 RGB76.4 RGB93.4 U9.14 | length 289.4
  Top w0.2: v1(47.843,8.545) 47.843,16.601 55.118,23.876 55.118,28.575 ; v1@49.827,49.238 49.827,38.946 55.118,33.655 55.118,28.575 ; v1(49.833,49.238) 49.833,49.302 49.625,49.509 49.625,83.013 49.675,83.063 49.675,84.473 50.666,85.464 v1(51.943,85.464) ; v1(56.769,28.575) 55.118,28.575 ; v1(61.396,68.168) 61.396,66.481 v1(61.413,66.464) 61.468,66.409 v1(61.468,60.198) ; v1(66.167,47.498) 66.176,47.507 v1(66.176,49.196) ; v1(157.607,18.161) 157.607,19.5 159.337,21.23 159.337,38.079 163.617,42.359 163.617,52.376 162.932,53.061 162.932,55.27 162.937,55.275 162.937,58.394 162.932,58.399 162.932,59.999 161.491,61.44 160.205,61.44 159.938,61.172 v1(159.938,61.171)
  Bottom w0.2: RGB93.4@38.407,9.464 40.358,9.464 41.277,8.545 v1(47.843,8.545) ; v1(49.657,68.199) 61.365,68.199 v1(61.396,68.168) ; v1(49.833,49.238) 66.134,49.238 v1(66.176,49.196) ; RGB19.4@50.282,85.464 v1(51.943,85.464) ; RGB76.4@55.037,28.464 55.148,28.575 v1(56.769,28.575) ; RGB40.4@59.782,66.464 v1(61.413,66.464) ; v1@61.411,60.208 122.322,60.208 123.559,61.444 126.417,61.444 126.844,61.017 159.621,61.017 159.775,61.171 v1(159.938,61.171) ; RGB61.4@64.537,47.464 64.571,47.498 v1(66.167,47.498) ; U9.14@157.607,16.256 v1(157.607,18.161)
LED3: RGB20.4 RGB41.4 RGB62.4 RGB77.4 RGB94.4 U9.13 | length 276
  Top w0.2: v1@66.106,9.317 66.106,30.714 69.662,34.27 69.662,36.367 68.735,37.294 68.735,45.482 69.937,46.684 69.937,72.052 69.882,72.107 69.882,85.087 69.999,85.204 v1(70.735,85.204) ; v1(75.692,22.86) v1(75.692,28.321) ; v1(80.348,66.464) v1(80.348,68.303) ; v1(85.584,49.253) 85.584,47.639 v1(85.598,47.625) ; v1(158.877,18.161) 158.877,20.205 159.737,21.065 159.737,37.913 164.017,42.193 164.017,52.542 163.332,53.227 163.332,55.104 163.337,55.109 163.337,58.559 163.332,58.564 163.332,60.165 161.657,61.84 159.829,61.84 159.593,61.604 v1(159.145,61.604)
  Bottom w0.2: RGB94.4@62.152,9.464 65.876,9.464 65.991,9.35 v1(66.074,9.35) ; v1(66.124,22.86) v1(75.692,22.86) ; RGB20.4@69.282,85.464 69.543,85.204 v1(70.735,85.204) ; v1(69.919,49.273) 85.565,49.273 v1(85.584,49.253) ; v1(69.936,68.376) 80.077,68.376 80.09,68.362 80.289,68.362 v1(80.348,68.303) ; v1(69.977,60.833) 70.202,60.608 122.157,60.608 123.393,61.844 126.751,61.844 127.165,61.43 158.887,61.43 159.061,61.604 v1(159.145,61.604) ; RGB77.4@74.037,28.464 74.18,28.321 v1(75.692,28.321) ; RGB41.4@78.782,66.464 v1(80.348,66.464) v1@80.391,66.421 ; RGB62.4@83.537,47.464 83.698,47.625 v1(85.598,47.625) ; U9.13@158.877,16.256 v1(158.877,18.161)
LED4: RGB21.4 RGB42.4 RGB63.4 RGB78.4 U9.5 | length 214.6
  Top w0.2: v1(89.731,85.479) 89.731,76.65 88.882,75.801 88.882,69.906 89.328,69.46 89.328,37.775 93.457,33.646 93.457,28.971 93.819,28.609 94.327,28.609 v1(94.361,28.575) ; v1(99.652,66.464) 99.695,66.508 v1(99.695,68.163) ; v1(103.284,49.231) 103.836,48.68 v1(103.836,47.607) ; v1(160.147,20.193) 160.137,20.203 160.137,37.328 164.417,41.608 164.417,52.78 164.395,52.78 163.732,53.443 163.732,54.939 163.737,54.944 163.737,61.749 v1(163.732,61.754)
  Bottom w0.2: RGB21.4@88.282,85.464 88.325,85.421 88.383,85.479 v1(89.731,85.479) ; v1(89.3,61.31) 122.27,61.31 123.204,62.244 126.917,62.244 127.331,61.83 127.508,61.83 127.527,61.849 158.388,61.849 158.698,62.158 159.485,62.158 159.812,61.831 163.655,61.831 v1(163.732,61.754) ; v1(89.315,49.301) 89.384,49.231 v1(103.284,49.231) ; v1(89.335,68.237) 99.424,68.237 99.44,68.222 99.636,68.222 v1(99.695,68.163) ; RGB78.4@93.037,28.464 93.148,28.575 v1(94.361,28.575) ; RGB42.4@97.782,66.464 v1(99.652,66.464) v1@99.695,66.421 ; RGB63.4@102.537,47.464 102.679,47.607 v1(103.836,47.607) ; v1(160.147,20.193) U9.5@160.147,21.956
LED5: RGB22.4 RGB43.4 RGB64.4 RGB79.4 U9.6 | length 173.4
  Top w0.2: v1(113.954,85.416) 113.954,74.768 117.983,70.739 117.983,66.614 118.044,66.675 ; v1(117.178,29.009) 117.178,35.223 116.237,36.164 116.237,40.234 121.539,45.536 121.539,47.674 ; v1(118.745,66.675) 118.044,66.675 ; v1(123.19,47.625) 123.141,47.674 121.539,47.674 ; v1(161.417,20.193) 161.417,30.917 164.235,33.735 164.235,33.75 164.937,34.452 164.937,62.198 v1(164.808,62.328) ; 118.044,66.675 118.044,61.945 118.044,56.962 121.539,53.467 121.539,47.674
  Bottom w0.2: RGB22.4@107.282,85.464 107.33,85.416 v1(113.954,85.416) ; RGB79.4@112.037,28.464 112.387,28.464 113.021,29.098 117.088,29.098 v1(117.178,29.009) ; RGB43.4@116.782,66.464 116.993,66.675 v1(118.745,66.675) ; v1(118.078,61.945) 122.27,61.945 122.969,62.644 127.082,62.644 127.477,62.249 158.134,62.249 158.443,62.558 159.651,62.558 159.902,62.308 164.788,62.308 v1(164.808,62.328) ; RGB64.4@121.537,47.464 121.698,47.625 v1(123.19,47.625) ; v1(161.417,20.193) U9.6@161.417,21.956
LED6: RGB23.4 RGB44.4 RGB65.4 RGB80.4 RGB95.4 U9.7 | length 166.3
  Top w0.2: v1(131.793,85.464) 131.793,76.278 135.971,72.1 135.971,66.421 ; v1(134.848,9.485) v1(137.622,9.485) ; v1(137.26,66.414) 137.253,66.421 135.971,66.421 ; v1(137.678,12.105) 137.678,14.341 136.517,15.502 136.517,28.575 136.517,38.727 140.576,42.786 v1(140.576,42.95) ; v1@140.589,42.929 140.589,47.625 ; v1(141.986,47.625) 140.589,47.625 ; v1(165.912,42.908) 165.912,37.426 170.111,33.228 170.111,30 171.158,28.953 v1(171.158,20.067) ; 135.971,66.421 135.971,57.693 140.589,53.075 140.589,47.625
  Bottom w0.2: RGB23.4@126.282,85.464 v1(131.793,85.464) ; RGB80.4@131.037,28.464 131.148,28.575 v1(136.525,28.575) ; RGB95.4@133.407,9.506 133.429,9.485 v1(134.848,9.485) ; RGB44.4@135.782,66.464 135.832,66.414 v1(137.26,66.414) ; v1(137.622,9.485) 137.622,12.049 v1(137.678,12.105) ; RGB65.4@140.537,47.464 140.698,47.625 v1(141.986,47.625) ; v1(140.576,42.95) 140.604,42.978 142.927,42.978 145.75,45.801 148.895,45.801 151.785,42.911 156.317,42.911 156.444,42.784 157.973,42.784 158.1,42.911 159.71,42.911 159.714,42.908 v1(165.912,42.908) ; U9.7@162.687,21.956 162.703,21.94 162.703,20.05 163.068,19.685 170.776,19.685 v1(171.158,20.067)
LED7: RGB24.4 RGB45.4 RGB66.4 RGB81.4 U9.8 | length 119.8
  Top w0.2: v1(147.193,84.582) 147.193,76.962 145.669,75.438 145.669,59.69 146.148,59.211 146.148,46.072 144.426,44.35 144.426,40.344 150.127,34.643 v1@150.127,30.369 ; v1(152.07,28.464) 152.128,28.523 152.128,28.718 152.146,28.735 v1(152.146,30.353) ; v1(156.13,68.326) 156.13,66.462 v1(156.157,66.436) ; v1(161.29,47.625) v1(161.29,49.282) ; v1(162.16,28.457) 162.16,21.989 v1(163.909,20.239)
  Bottom w0.2: RGB24.4@145.282,85.464 146.759,85.464 147.193,85.031 v1(147.193,84.582) ; v1(145.681,68.339) 156.118,68.339 v1(156.13,68.326) ; v1(146.14,49.308) 161.264,49.308 v1(161.29,49.282) ; RGB81.4@150.037,28.464 162.152,28.464 v1(162.16,28.457) ; v1(150.114,30.353) v1(152.146,30.353) ; RGB45.4@154.782,66.464 154.811,66.436 v1(156.157,66.436) ; RGB66.4@159.537,47.464 159.698,47.625 v1(161.29,47.625) ; v1(163.909,20.239) 163.933,20.263 163.933,21.932 U9.8@163.957,21.956
LED8: RGB25.4 RGB46.4 RGB67.4 RGB82.4 U12.16 | length 111.2
  Top w0.2: v1@165.337,49.364 v1(165.491,49.364) ; v1(166.246,85.394) 166.196,85.344 164.455,85.344 164.338,85.227 v1(164.338,68.415) 165.4,67.353 165.4,49.493 165.337,49.43 165.337,37.436 169.711,33.062 169.711,28.518 ; v1(168.91,18.019) 168.91,27.718 169.711,28.518 ; v1(170.597,28.518) 169.711,28.518 ; v1(175.574,66.43) 175.633,66.489 175.633,66.694 175.641,66.701 v1(175.641,68.326) ; v1(180.086,47.625) 180.122,47.661 v1(180.122,49.281)
  Bottom w0.2: RGB25.4@164.282,85.464 164.353,85.394 v1(166.246,85.394) ; v1(164.338,68.415) 175.37,68.415 175.4,68.385 175.582,68.385 v1(175.641,68.326) ; v1(165.491,49.364) 165.533,49.323 180.08,49.323 v1(180.122,49.281) ; U12.16@168.91,16.256 v1(168.91,18.019) ; RGB82.4@169.037,28.464 169.091,28.518 v1(170.597,28.518) ; RGB46.4@173.782,66.464 173.816,66.43 v1(175.574,66.43) ; RGB67.4@178.537,47.464 178.698,47.625 v1(180.086,47.625)
LED9: RGB26.4 RGB33.4 RGB47.4 RGB68.4 RGB83.4 U12.15 | length 148.3
  Top w0.2: v1(170.22,18.035) 171.726,19.542 v1(171.726,30.406) ; v1(189.691,28.513) 189.693,28.515 v1(189.693,30.435) ; v1(194.686,85.545) 194.686,79.253 196.462,77.477 196.462,62.152 201.288,57.326 201.288,42.03 196.977,37.719 v1(196.977,28.511) 196.977,20.084 202.311,14.75 202.311,9.779 202.692,9.398 v1(203.835,9.398)
  Bottom w0.2: U12.15@170.18,16.256 170.22,16.296 v1(170.22,18.035) ; v1(171.726,30.406) 171.743,30.39 189.648,30.39 v1(189.693,30.435) v1@189.738,30.48 ; RGB26.4@183.282,85.464 183.362,85.545 v1(194.686,85.545) ; RGB83.4@188.037,28.464 196.93,28.464 v1(196.977,28.511) ; RGB47.4@192.782,66.464 192.825,66.421 v1(196.469,66.421) ; RGB68.4@197.537,47.464 197.598,47.526 v1(201.313,47.526) ; RGB33.4@202.37,9.464 202.436,9.398 v1(203.835,9.398)
LED10: RGB27.4 RGB48.4 RGB69.4 RGB74.4 RGB84.4 U12.14 | length 150.6
  Top w0.2: v1(207.104,85.464) 207.104,76.614 212.142,71.576 212.142,67.566 v1(212.13,67.553) ; v1@212.142,67.553 212.142,57.352 216.588,52.906 216.588,48.14 216.584,48.136 v1(216.584,48.095) ; v1(216.54,22.06) 216.588,22.013 216.588,18.961 219.42,16.129 221.107,16.129 221.488,15.748 221.488,9.906 221.93,9.464 v1(222.936,9.464) ; v1@216.588,22.06 216.588,28.558 v1@216.588,48.136
  Bottom w0.2: U12.14@171.45,16.256 171.452,16.258 171.452,18.253 171.656,18.457 188.99,18.457 192.594,22.06 v1(216.54,22.06) ; RGB27.4@202.282,85.464 v1(207.104,85.464) ; RGB84.4@207.037,28.464 207.13,28.558 v1(216.534,28.558) ; RGB48.4@211.782,66.464 212.13,66.812 v1(212.13,67.553) ; RGB69.4@216.537,47.464 216.584,47.511 v1(216.584,48.095) ; RGB74.4@221.457,9.464 v1(222.936,9.464)
LED11: RGB28.4 RGB49.4 RGB70.4 RGB85.4 RGB99.4 U12.13 | length 193.1
  Top w0.2: v1(223.362,85.44) 223.386,85.415 223.386,78.098 220.345,75.057 220.345,68.868 220.345,49.299 220.345,39.624 226.323,33.646 226.323,28.502 ; v1(226.339,22.02) 226.339,28.487 226.323,28.502 ; v1(227.553,28.502) 226.323,28.502 ; v1(232.653,66.464) 232.664,66.475 v1(232.664,68.326) ; v1(236.662,22.017) 236.662,18.608 241.046,14.224 241.046,9.906 241.433,9.519 v1(241.984,9.519) ; v1(237.409,47.498) v1(237.409,49.235)
  Bottom w0.2: U12.13@172.72,16.256 172.744,16.28 172.744,17.869 172.861,17.986 189.182,17.986 192.623,21.427 225.746,21.427 v1(226.339,22.02) ; v1(220.269,49.299) 237.345,49.299 v1(237.409,49.235) ; v1(220.296,68.868) 225.276,68.868 226.089,68.054 232.392,68.054 v1(232.664,68.326) ; RGB28.4@221.282,85.464 221.307,85.44 v1(223.362,85.44) ; RGB85.4@226.037,28.464 226.074,28.502 v1(227.553,28.502) ; v1@226.392,21.998 236.643,21.998 v1(236.662,22.017) ; RGB49.4@230.782,66.464 v1(232.653,66.464) ; RGB70.4@235.537,47.464 235.571,47.498 v1(237.409,47.498) ; RGB99.4@240.507,9.464 240.561,9.519 v1(241.984,9.519)
LED12: RGB29.4 RGB50.4 RGB86.4 RGB100.4 U12.5 | length 178
  Top w0.2: v1(241.804,85.141) 242.396,84.549 242.396,79.763 250.239,71.92 250.239,67.558 250.239,57.068 254.885,52.422 254.885,35.433 256.032,34.286 v1(256.032,28.448) 256.032,22.503 256.032,18.796 259.461,15.367 259.461,11.422 260.73,10.153 v1(260.73,9.466)
  Bottom w0.2: U12.5@173.99,21.956 173.99,19.087 174.107,18.97 188.687,18.97 192.331,22.614 255.907,22.614 v1(256.019,22.503) ; RGB29.4@240.282,85.464 241.481,85.464 v1(241.804,85.141) ; RGB50.4@249.782,66.464 249.842,66.464 250.242,66.864 v1(250.242,67.558) ; RGB86.4@252.452,28.514 252.518,28.448 v1(256.032,28.448) ; RGB100.4@259.373,9.498 260.697,9.498 v1(260.73,9.466)